# Altium PCB ESP32 with USBC PCB V1l1.PcbDoc (part 1 of 3)
Units mil, origin at the board's own origin, x right, y up, seen from the top; angles counter-clockwise.
Board outline 2700 x 1000 mil, 4 copper layers (L1, L2, L3, L4), stack 61.581 mil thick; 64 components, 73 nets, 299 pads, 161 vias.
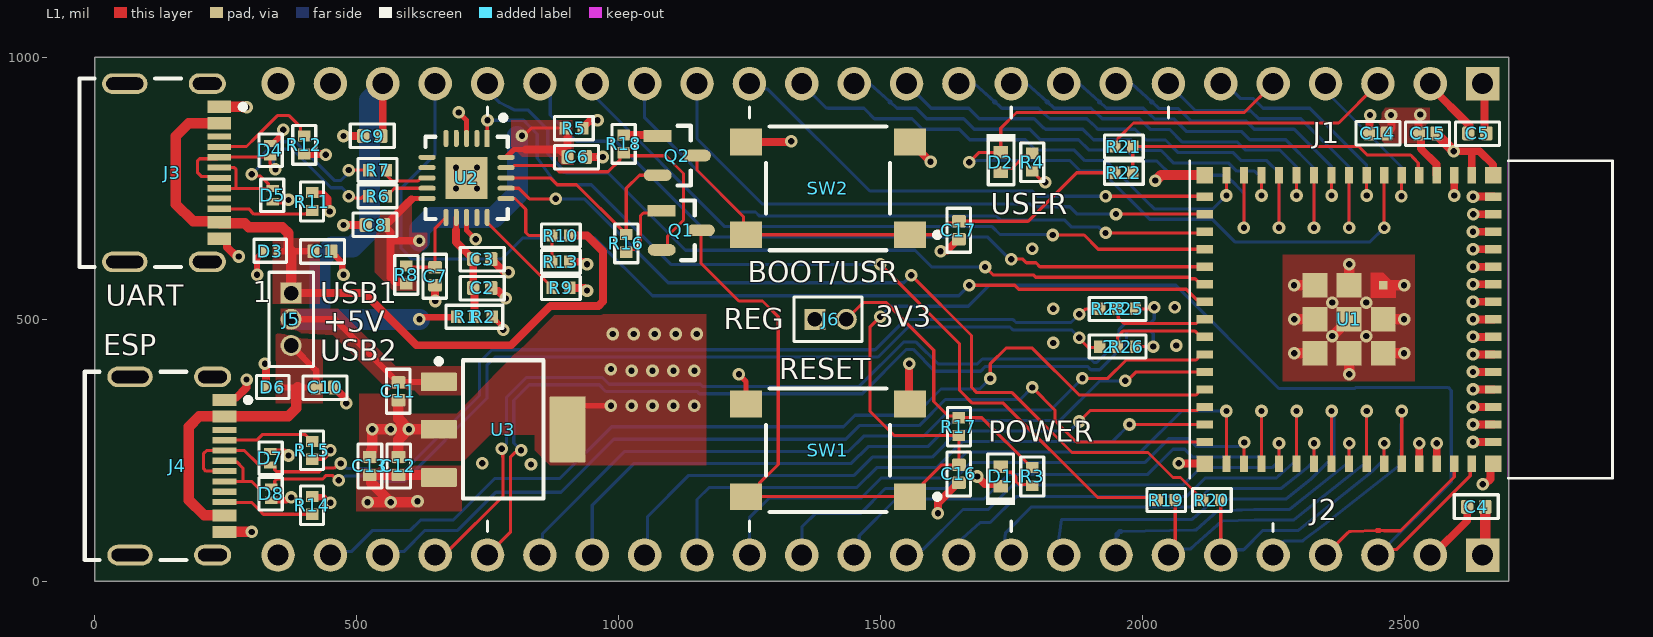
[diagram p0: L1 view]
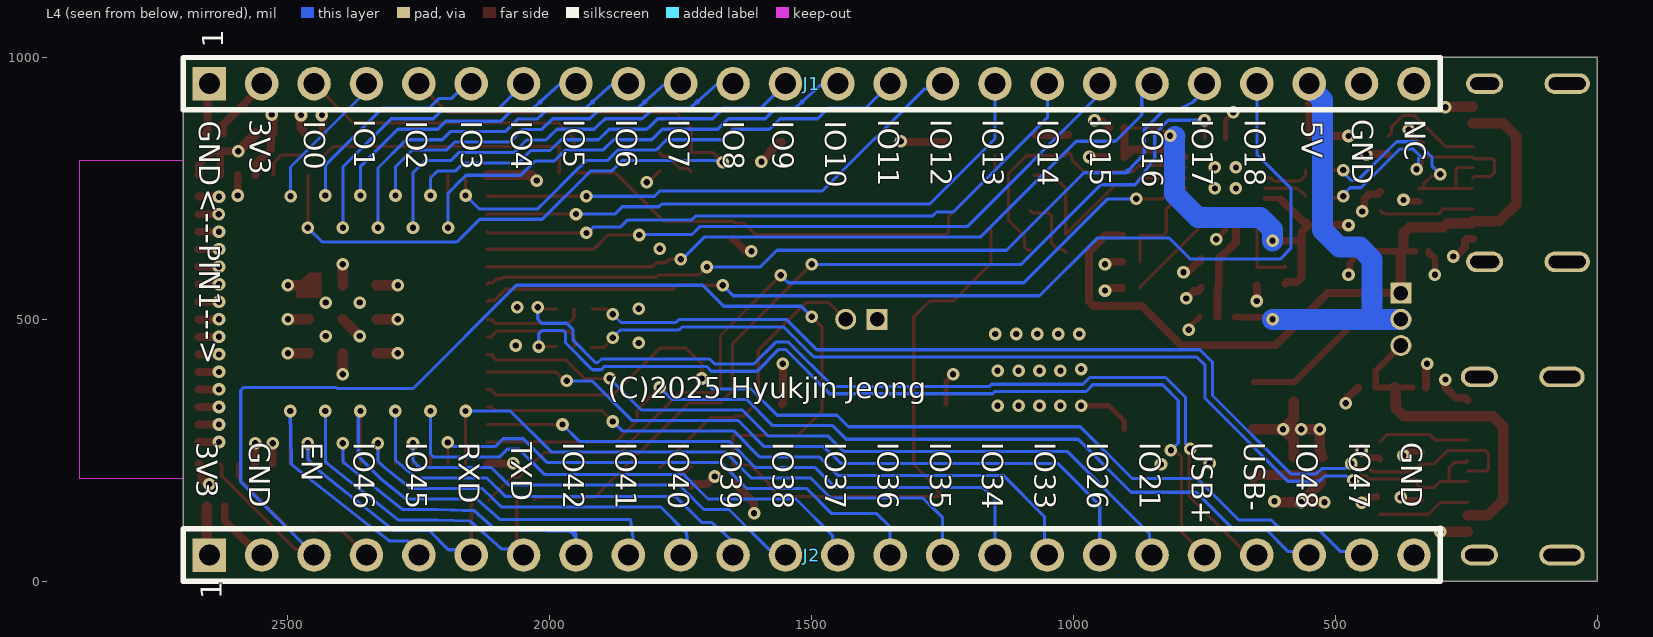
[diagram p1: L4 view, seen from below]
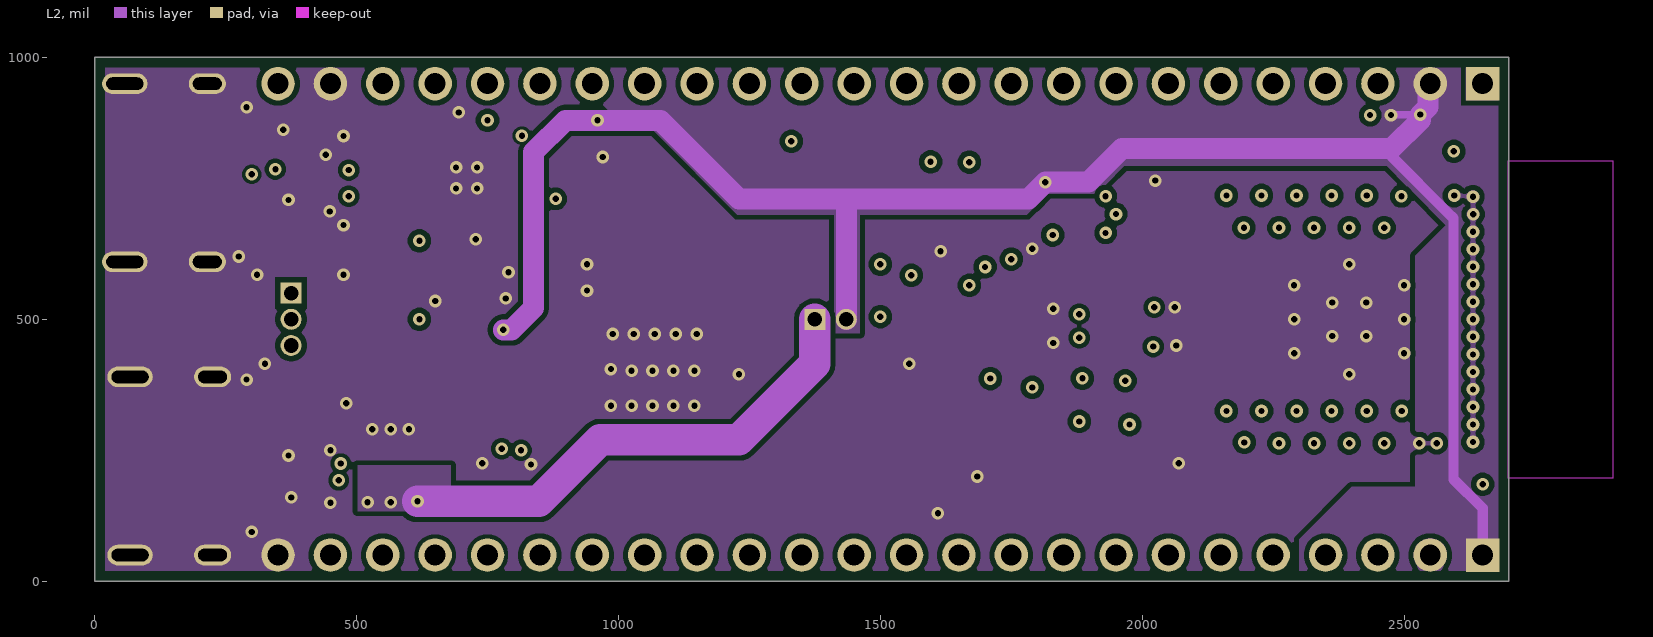
[diagram p2: L2]
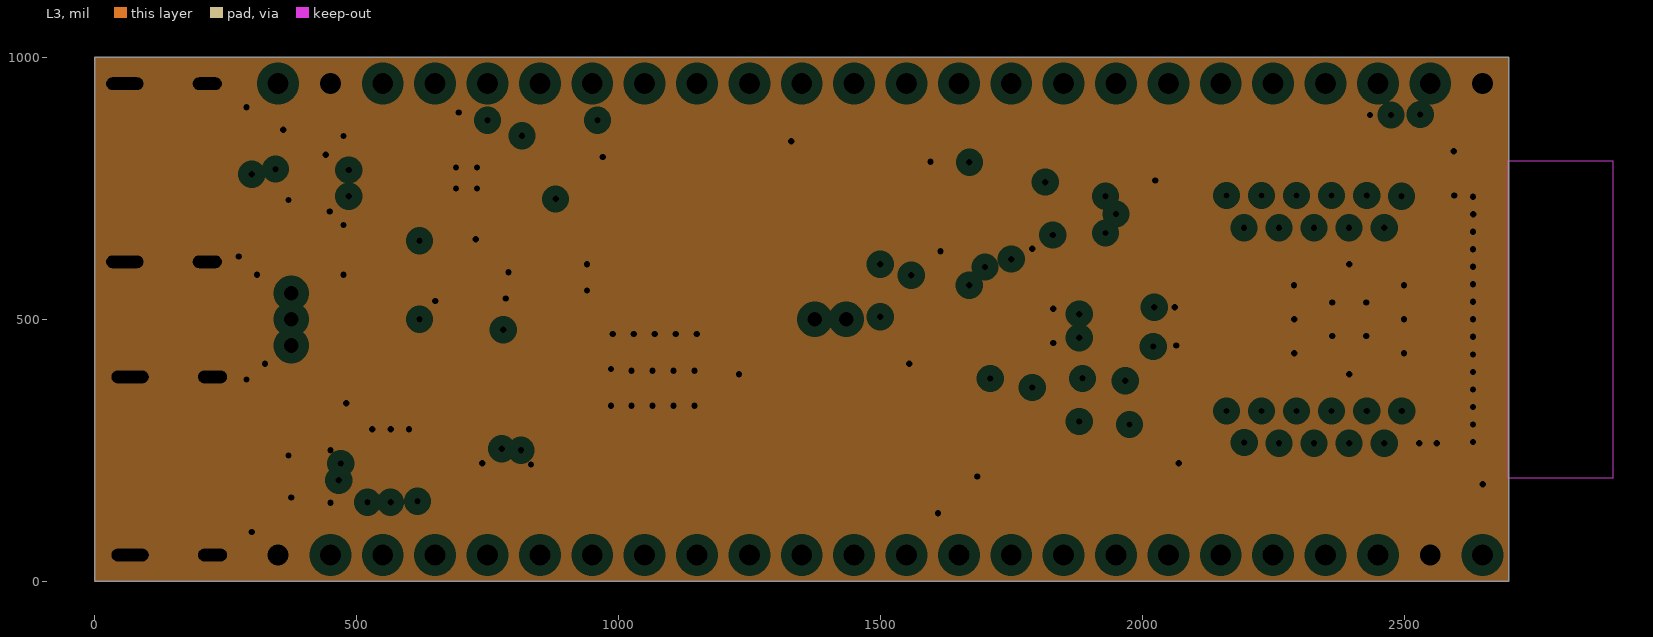
[diagram p3: L3, clearances drawn from the general rule]
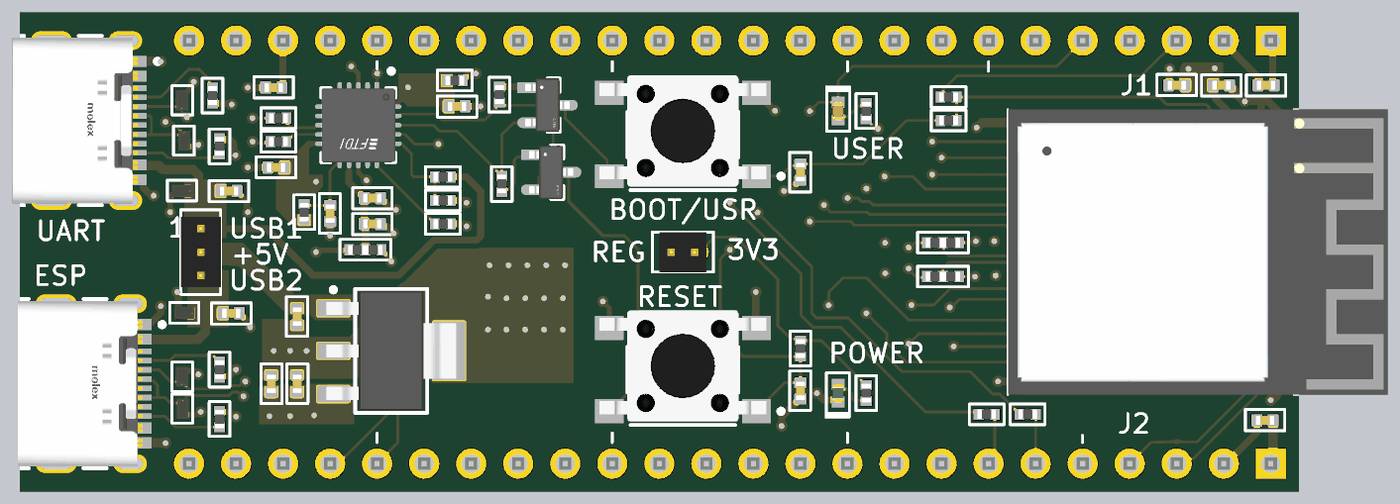
[diagram p5: 3D render of the assembled board from above, using the file's embedded part models]

## Layer stack, top to bottom
Top Solder: solder mask 0.4, Solder Resist, Dk 3.5
L1: signal copper 1.378
Dielectric 2: prepreg 3.913, PP-006, Dk 4.1
L2: signal copper 0.598
Dielectric 1: dielectric 49.803, FR-4, Dk 4.8
L3: plane copper 0.598, net GND
Dielectric 3: prepreg 3.913, PP-006, Dk 4.1
L4: signal copper 1.378
Bottom Solder: solder mask 0.4, Solder Resist, Dk 3.5

## Board outline
0,0 2700,0 2700,1000 0,1000

## Design rules (kind name [scope] priority, off if disabled: settings)
Clearance SMALLER [All vs WithinRoom('FTDI')or WithinRoom('USBC2')or WithinRoom('USBC1')] p1: gap=6 ignorepadtopadclearanceinfootprint=FALSE
Clearance "DIFF90 Clearnace" [InDifferentialPairClass('DIFF90')] p2: gap=8 ignorepadtopadclearanceinfootprint=FALSE
Clearance [All] p3: gap=10 ignorepadtopadclearanceinfootprint=FALSE except(6: SMDPad-SMDPad)
ComponentClearance R1R2 [InComponent('R1-or') vs InComponent('R2-OR')] p1: gap=0 collisioncheckmode=3 verticalgap=0 showdistances=FALSE
ComponentClearance R23R25 [InComponent('R23') vs InComponent('R25')] p2: gap=0 collisioncheckmode=3 verticalgap=0 showdistances=FALSE
ComponentClearance R24R26 [InComponent('R24') vs InComponent('R26')] p3: gap=0 collisioncheckmode=3 verticalgap=0 showdistances=FALSE
ComponentClearance [All] p4: gap=10 collisioncheckmode=3 verticalgap=10 showdistances=FALSE
DiffPairsRouting DIFF90 [InDifferentialPairClass('DIFF90')] p1: maxlimit=8.1 minlimit=8 mostfreqgap=8 toplayer_minwidth=6.03 toplayer_maxwidth=6.23 toplayer_prefwidth=6.03 midlayer1_minwidth=5.1 midlayer1_maxwidth=5.2 midlayer1_prefwidth=5.1 bottomlayer_minwidth=6.03 bottomlayer_maxwidth=6.23 bottomlayer_prefwidth=6.03 maxuncoupledlength=500
MinimumSolderMaskSliver [All] p1: minsoldermaskwidth=3.15
PlaneClearance [All] p1: clearance=20
PlaneConnect [All] p1: pad.planeconnectstyle=Relief pad.reliefexpansion=20 pad.reliefentries=4 pad.reliefconductorwidth=20 pad.reliefairgap=10 via.planeconnectstyle=Direct via.reliefexpansion=20 via.reliefentries=4 via.reliefconductorwidth=10 via.reliefairgap=10
PolygonConnect [All] p1: connectstyle=Direct reliefconductorwidth=10 reliefentries=4 polygonreliefangle="90 Angle" airgapwidth=10
RoomDefinition FTDI [False vs False] p1: confinementstyle=ConfineIn formatcopy=TRUE lockcomponents=FALSE outline 605,870 835,870 835,650 605,650
RoomDefinition USBC1 [False vs False] p2: confinementstyle=ConfineIn formatcopy=TRUE lockcomponents=FALSE outline 165,930 305,930 305,635 165,635
RoomDefinition USBC2 [False vs False] p3: confinementstyle=ConfineIn formatcopy=TRUE lockcomponents=FALSE outline 180,370 315,370 315,75 180,75
RoutingVias [All] p1: holewidth=12 width=24 viastyle="Through Hole" minholewidth=12 minwidth=24 maxholewidth=12 maxwidth=24
SilkToSilkClearance [All] p1: silktosilkclearance=6
SilkToSolderMaskClearance [IsPad] p1: minsilkscreentomaskgap=5 clearancetoexposedcopper=TRUE
SolderMaskExpansion [All] p1: expansion=2 istentingtop=FALSE
SupplyNets "Schematic Supply Nets_5" [InNet('GND')] p1: voltage=0.000
SupplyNets "Schematic Supply Nets_3" [InNet('+3V3')] p2: voltage=0.000
SupplyNets "Schematic Supply Nets_4" [InNet('+5V_VBUS1')] p3: voltage=0.000
SupplyNets "Schematic Supply Nets_2" [InNet('+5V_VBUS2')] p4: voltage=0.000
SupplyNets "Schematic Supply Nets_1" [InNet('+3V3_REG')] p5: voltage=0.000
SupplyNets "Schematic Supply Nets" [InNet('+5V')] p6: voltage=0.000
Width [All] p1: maxlimit=100 minlimit=6 preferedwidth=10 minimp=50.000000 maximp=50.000000 favimp=50.000000
23 further rules are at their usual default settings.

## Classes and differential pairs
differential pair class DIFF90: CON1_USB CON2_USB CON_ESP_USB ESP_USB FTDI_USB
differential pair FTDI_USB: +FTDI_USB_P -FTDI_USB_N
differential pair ESP_USB: +ESP_USB_P -ESP_USB_N
differential pair CON_ESP_USB: +CON_ESP_USB_P -CON_ESP_USB_N
differential pair CON2_USB: +CON2_USB_P -CON2_USB_N
differential pair CON1_USB: +CON1_USB_P -CON1_USB_N

## Components (designator, comment, footprint, x,y, rotation, side; value= is the part's Value field where it differs from the comment)
2 "0R" RESC1005X37N#1 1936,448 r0 top value=0Ω (schematic designator R24)
C1 "100nF, 50V" CAPC1005X65N 435,630 r180 top value=100nF
C2 "4u7, 16V" CAPC1005X65N 740,560 r180 top value=4.7µF
C3 "100nF, 50V" CAPC1005X65N 740,615 r180 top value=100nF
C4 "100nF, 50V" CAPC1005X65N 2637.8,142 r0 top value=100nF
C5 "100nF, 50V" CAPC1005X65N 2640,855 r180 top value=100nF
C6 "100nF, 50V" CAPC1005X65N 920,810 r180 top value=100nF
C7 "100nF, 50V" CAPC1005X65N 650,582.2 r90 top value=100nF
C8 "100nF, 50V" CAPC1005X65N 535,680 r0 top value=100nF
C9 "100nF, 50V" CAPC1005X65N 530,850 r0 top value=100nF
C10 "100nF, 50V" CAPC1005X65N 440,370 r180 top value=100nF
C11 "4u7, 16V" CAPC1005X65N 580,362.8 r90 top value=4.7µF
C12 "10uF, 10V" CAPC1005X65N 580,220 r270 top value=10µF
C13 "10uF, 10V" CAPC1005X65N 525,220 r270 top value=10µF
C14 "10uF, 10V" CAPC1005X65N 2450,855 r0 top value=10µF
C15 "100nF, 50V" CAPC1005X65N 2545,855 r180 top value=100nF
C16 "1uF, 35V" CAPC1005X65N 1650,205 r90 top value=1µF
C17 "100nF, 50V" CAPC1005X65N 1650,670 r90 top value=100nF
D1 "GREEN" LED0402G 1730,200 r90 top
D2 "RED" LED0402R 1730,800 r270 top
D3 "AQ3045-01ETG" SOD882 335,630 r0 top
D4 "AQ3045-01ETG" SOD882 335,822.8 r270 top
D5 "AQ3045-01ETG" SOD882 340,737.2 r90 top
D6 "AQ3045-01ETG" SOD882 340,370 r0 top
D7 "AQ3045-01ETG" SOD882 335,234.8 r270 top
D8 "AQ3045-01ETG" SOD882 337,167.2 r90 top
J1 "22-28-4245" HDR_1X24_2.54MM 2650,950 r90 bottom
J2 "22-28-4245" HDR_1X24_2.54MM 2650,50 r90 bottom locked
J3 "217179-0001" FP-2171790001-MFG 102.8,779.92 r270 top
J4 "217179-0001" FP-2171790001-MFG 112.8,220.08 r270 top
J5 "FTS-103-01-F-S" HDR_1X3_1.27MM 375,550 r0 top locked
J6 "FTS-102-01-F-S" HDR_1X2_1.27MM 1375,500 r90 top
Q1 "SS8050-G" FP-SS8050-G-IPC_B 1120,670 r0 top
Q2 "SS8050-G" FP-SS8050-G-IPC_B 1112.42,812.6 r0 top
R1 "0R" RESC1005X37N#1 708,505 r0 top value=0Ω
R2 "0R" RESC1005X37N#1 742.01,505 r180 top value=0Ω
R3 "1K" RESC1005X37N#1 1790,200 r90 top value=10kΩ
R4 "1K" RESC1005X37N#1 1790,800 r270 top value=10kΩ
R5 "0R" RESC1005X37N#1 915,865 r180 top value=0Ω
R6 "27R" RESC1005X37N#1 540,735 r0 top value=27Ω
R7 "27R" RESC1005X37N#1 540,785 r0 top value=27Ω
R8 "0R" RESC1005X37N#1 595,585 r90 top value=0Ω
R9 "10k" RESC1005X37N#1 890,560 r0 top value=10kΩ
R10 "4k7" RESC1005X37N#2 890,660 r0 top value=4.7kΩ
R11 "5k1" RESC1005X37N#1 415,725 r270 top value=5.1kΩ
R12 "5k1" RESC1005X37N#1 400,832.99 r90 top value=5.1kΩ
R13 "10k" RESC1005X37N#1 890,610 r180 top value=10kΩ
R14 "5k1" RESC1005X37N#1 415,145 r270 top value=5.1kΩ
R15 "5k1" RESC1005X37N#1 415,250 r90 top value=5.1kΩ
R16 "10k" RESC1005X37N#1 1015,645 r270 top value=10kΩ
R17 "10k" RESC1005X37N#1 1650,295 r90 top value=10kΩ
R18 "10k" RESC1005X37N#1 1010,835 r90 top value=10kΩ
R19 "0R" RESC1005X37N#1 2046,155 r180 top value=0Ω
R20 "0R" RESC1005X37N#1 2133,155 r180 top value=0Ω
R21 "27R" RESC1005X37N#1 1965,830 r0 top value=27Ω
R22 "27R" RESC1005X37N#1 1965,780 r0 top value=27Ω
R23 "0R" RESC1005X37N#1 1936,520 r0 top value=0Ω
R25 "0R" RESC1005X37N#1 1970,520 r180 top value=0Ω
R26 "0R" RESC1005X37N#1 1970,448 r180 top value=0Ω
SW1 "PTS645SH50SMTR92LFS" FP-PTS645SH50SMTR92LFS-MFG 1400,250 r180 top locked
SW2 "PTS645SH50SMTR92LFS" FP-PTS645SH50SMTR92LFS-MFG 1400,750 r180 top locked
U1 "ESP32-S3-MINI-1-N8" XCVR_ESP32-S3-MINI-1-N8 2395.04,500 r270 top
U2 "FT231XQ-R" FP-QFN-20-IPC_B 710,770 r270 top
U3 "TL1963A-33DCYR" DCY0004A_N 780,290 r0 top locked

## Footprints (in the part's own frame and the unit in brackets; to place one, negate y for a bottom-side part, rotate by r counter-clockwise, add the part's x,y. Pads: shape width x height; smd on the part's side, far side on the other; paste and mask are expansions set on the pad)
CAPC1005X65N [mm]
  rrect25% 0.6x0.67 smd: 1(-0.437,0) 2(0.437,0)
  silkscreen extent -1.07,-0.56 1.07,0.58, body extent -0.5,-0.25 0.5,0.25, height 0.65
DCY0004A_N [mm] "SOT223, 4-Leads, Body 6.7x3.7mm, Pitch 2.3mm, IPC Medium Density"
  rrect11% 1.75x0.9 smd: 1(-3.125,2.3) 2(-3.125,0) 3(-3.125,-2.337)
  rrect6% 1.75x3.2 smd: 4(3.125,0)
  silkscreen extent -3.25,-3.35 1.95,3.42, body extent -3.5,-3.25 3.5,3.25, height 1.62
FP-2171790001-MFG [mm]
  rect 0.6x1.15 smd paste+0 mask+0: A1B12(-3.2,3.425) A4B9(-2.4,3.425) B1A12(3.2,3.425) B4A9(2.4,3.425)
  rect 0.3x1.15 smd paste+0 mask+0: A5(-1.25,3.425) A6(-0.25,3.425) A7(0.25,3.425) A8(1.25,3.425) B5(1.75,3.425) B6(0.75,3.425) B7(-0.75,3.425) B8(-1.75,3.425)
  rrect100% 1x1.8 hole 1.4 slot 0.6 at 0 deg paste-2539.97 mask+0: S1(-4.32,2.85) S2(4.32,2.85)
  rrect100% 1x2.2 hole 1.8 slot 0.6 at 0 deg paste-2539.97 mask+0: S3(-4.32,-1.15) S4(4.32,-1.15)
  silkscreen extent -4.57,-3.35 4.57,4.7, body extent -4.92,-3.45 4.92,4.1, height 0.25
FP-PTS645SH50SMTR92LFS-MFG [mm]
  rect 1.55x1.3 smd paste+0 mask+0: 1(-3.975,2.25) 2(3.975,2.25) 3(-3.975,-2.25) 4(3.975,-2.25)
  silkscreen extent -5.43,-3 3,3, body extent -4.5,-3.2 4.5,2.8, height 5
FP-QFN-20-IPC_B [mm]
  rect 0.84x0.242 smd paste+0 mask+0: 1(-1.916,1)
  rrect100% 0.84x0.242 smd paste+0 mask+0: 2(-1.916,0.5) 3(-1.916,0) 4(-1.916,-0.5) 5(-1.916,-1) 11(1.916,-1) 12(1.916,-0.5) 13(1.916,0) 14(1.916,0.5) 15(1.916,1)
  rrect100% 0.242x0.84 smd paste+0 mask+0: 6(-1,-1.916) 7(-0.5,-1.916) 8(0,-1.916) 9(0.5,-1.916) 10(1,-1.916) 16(1,1.916) 17(0.5,1.916) 18(0,1.916) 19(-0.5,1.916) 20(-1,1.916)
  rect 2.05x2.05 smd paste-1000 mask+0: 21(0,0)
  silkscreen extent -3.05,-2 2,2, body extent -2.59,-2.59 2.59,2.59, height 0.25
FP-SS8050-G-IPC_B [mm]
  rect 1.357x0.572 smd paste+0 mask+0: 1(-0.951,0.95)
  rrect100% 1.357x0.572 smd paste+0 mask+0: 2(-0.951,-0.95) 3(0.951,0)
  silkscreen extent 0,-1.45 0.65,1.45, body extent -1.88,-1.7 1.88,1.7, height 0.25
HDR_1X2_1.27MM [mil]
  rect 40x40 hole 28: 1(0,0)
  round 40 hole 28: 2(0,-60)
  silkscreen extent -42,-90 43,40, body extent -42,-75 43,25, height 154
HDR_1X3_1.27MM [mil]
  rect 40x40 hole 28: 1(0,0)
  round 40 hole 28: 2(0,-50) 3(0,-100)
  silkscreen extent -42,-140 42,40, body extent -42,-125 42,25, height 154
HDR_1X24_2.54MM [mil]
  rect 64x64 hole 40: 1(0,0)
  round 64 hole 40: 2(0,-100) 3(0,-200) 4(0,-300) 5(0,-400) 6(0,-500) 7(0,-600) 8(0,-700) 9(0,-800) 10(0,-900) 11(0,-1000) 12(0,-1100) 13(0,-1200) 14(0,-1300) 15(0,-1400) 16(0,-1500) 17(0,-1600) 18(0,-1700) 19(0,-1800) 20(0,-1900) 21(0,-2000) 22(0,-2100) 23(0,-2200) 24(0,-2300)
  silkscreen extent -50,-2350 50,50, body extent -49,-2350 49,50, height 340
LED0402G [mm]
  rect 0.6x0.7 smd: 1(-0.475,0) 2(0.475,0)
  silkscreen extent -1.37,-0.69 1.09,0.71, body extent -0.5,-0.3 0.5,0.3, height 0.2
LED0402R [mm]
  rect 0.6x0.7 smd: 1(-0.475,0) 2(0.475,0)
  silkscreen extent -1.37,-0.69 1.09,0.71, body extent -0.5,-0.3 0.5,0.3, height 0.2
RESC1005X37N#1 [mm]
  rect 0.54x0.6 smd: 1(-0.432,0) 2(0.432,0)
  silkscreen extent -0.94,-0.56 0.94,0.56, body extent -0.5,-0.25 0.5,0.25, height 0.37
RESC1005X37N#2 [mm]
  rect 0.54x0.6 smd: 2(0.432,0) ""(-0.432,0)
  silkscreen extent -0.94,-0.56 0.94,0.56, body extent -0.5,-0.25 0.5,0.25, height 0.37
SOD882 [mm]
  rect 0.35x0.6 smd: 1(-0.325,0) 2(0.325,0)
  silkscreen extent -0.79,-0.53 0.79,0.58, body extent -0.55,-0.33 0.55,0.33, height 0.57
XCVR_ESP32-S3-MINI-1-N8 [mm]
  rect 0.8x0.4 smd: 1(-7,5.95) 2(-7,5.1) 3(-7,4.25) 4(-7,3.4) 5(-7,2.55) 6(-7,1.7) 7(-7,0.85) 8(-7,0) 9(-7,-0.85) 10(-7,-1.7) 11(-7,-2.55) 12(-7,-3.4) 13(-7,-4.25) 14(-7,-5.1) 15(-7,-5.95) 31(7,-5.95) 32(7,-5.1) 33(7,-4.25) 34(7,-3.4) 35(7,-2.55) 36(7,-1.7) 37(7,-0.85) 38(7,0) 39(7,0.85) 40(7,1.7) 41(7,2.55) 42(7,3.4) 43(7,4.25) 44(7,5.1) 45(7,5.95)
  rect 0.4x0.8 smd: 16(-5.95,-7) 17(-5.1,-7) 18(-4.25,-7) 19(-3.4,-7) 20(-2.55,-7) 21(-1.7,-7) 22(-0.85,-7) 23(0,-7) 24(0.85,-7) 25(1.7,-7) 26(2.55,-7) 27(3.4,-7) 28(4.25,-7) 29(5.1,-7) 30(5.95,-7) 46(5.95,7) 47(5.1,7) 48(4.25,7) 49(3.4,7) 50(2.55,7) 51(1.7,7) 52(0.85,7) 53(0,7) 54(-0.85,7) 55(-1.7,7) 56(-2.55,7) 57(-3.4,7) 58(-4.25,7) 59(-5.1,7) 60(-5.95,7)
  rect 1.2x1.2 smd: 61(0,0) 67(0,1.65) 68(1.65,1.65) 69(-1.65,0) 70(1.65,0) 71(-1.65,-1.65) 72(0,-1.65) 73(1.65,-1.65)
  rect 0.8x0.8 smd: 62(-7,7) 63(-7,-7) 64(7,-7) 65(7,7)
  rect 0.4x0.4 smd paste-1 mask+0: 66(-1.65,1.65)
  L1 region: -1.05,1.05 -2.25,1.05 -2.25,1.65 -1.65,2.25 -1.05,2.25
  Keep-Out Layer region: 7.7,7.725 -7.7,7.725 -7.7,12.775 7.7,12.775
  Keep-Out Layer region: 7.7,7.725 -7.7,7.725 -7.7,12.775 7.7,12.775
  silkscreen extent -7.7,-7.73 7.7,12.78, body extent -7.7,-7.71 7.7,12.79, height 2.56

## Part data
2 R1 R2 R5 R8 R19 R20 R23 R25 R26: library part RC0402JR-070RL, "RES 0 OHM JUMPER 1/16W 0402", Case Code (Imperial)=0402, LCSC Part Number=C60485, Manufacturer="Yageo Group", Max Operating Temperature=155°C, Max Power Dissipation=63mW, Min Operating Temperature=-55°C, Power Dissipation=62.5mW, Supplier Part Number=311-0.0JRCT-ND, Temperature Coefficient=200ppm/°C, Tolerance=5%, Voltage Rating=50V, Case/Package=0402, Category="Chip SMD Resistors", China RoHS=Non-Compliant, ComponentLink1Description=https://datasheet.octopart.com:443/RC0402JR-070RL-Yageo-datasheet-182189538.pdf?src-supplier=IHS, ComponentLink1URL=https://datasheet.octopart.com:443/RC0402JR-070RL-Yageo-datasheet-182189538.pdf?src-supplier=IHS, ComponentLink2Description=https://datasheet.octopart.com:443/RC0402JR-070RL-Yageo-datasheet-10408619.pdf?src-supplier=Newark, ComponentLink2URL=https://datasheet.octopart.com:443/RC0402JR-070RL-Yageo-datasheet-10408619.pdf?src-supplier=Newark, ComponentLink3Description=https://datasheet.octopart.com:443/RC0402JR-070RL-Yageo-datasheet-12531192.pdf?src-supplier=Seeed+Studio, ComponentLink3URL=https://datasheet.octopart.com:443/RC0402JR-070RL-Yageo-datasheet-12531192.pdf?src-supplier=Seeed+Studio, ComponentLink4Description=https://datasheet.octopart.com:443/RC0402JR-070RL-Yageo-datasheet-8324527.pdf?src-supplier=TME, ComponentLink4URL=https://datasheet.octopart.com:443/RC0402JR-070RL-Yageo-datasheet-8324527.pdf?src-supplier=TME, ComponentLink5Description=https://datasheet.octopart.com:443/RC0402JR-070RL-Yageo-datasheet-62067350.pdf?src-supplier=Farnell, ComponentLink5URL=https://datasheet.octopart.com:443/RC0402JR-070RL-Yageo-datasheet-62067350.pdf?src-supplier=Farnell, ComponentLink6Description=https://datasheet.octopart.com:443/RC0402JR-070RL-Yageo-datasheet-8329306.pdf?src-supplier=element14, ComponentLink6URL=https://datasheet.octopart.com:443/RC0402JR-070RL-Yageo-datasheet-8329306.pdf?src-supplier=element14, ComponentLink7Description=https://datasheet.octopart.com:443/RC0402JR-070RL-Yageo-datasheet-505231.pdf?src-supplier=element14, ComponentLink7URL=https://datasheet.octopart.com:443/RC0402JR-070RL-Yageo-datasheet-505231.pdf?src-supplier=element14, ComponentLink8Description=https://datasheet.octopart.com:443/RC0402JR-070RL-Yageo-datasheet-175423674.pdf?src-supplier=SOS+electronic, ComponentLink8URL=https://datasheet.octopart.com:443/RC0402JR-070RL-Yageo-datasheet-175423674.pdf?src-supplier=SOS+electronic, ComponentLink9Description=https://datasheet.octopart.com:443/RC0402JR-070RL-Yageo-datasheet-164759695.pdf?src-supplier=Future+Electronics, ComponentLink9URL=https://datasheet.octopart.com:443/RC0402JR-070RL-Yageo-datasheet-164759695.pdf?src-supplier=Future+Electronics, ComponentLink10Description=https://datasheet.octopart.com:443/RC0402JR-070RL-Yageo-datasheet-137700087.pdf?src-supplier=Future+Electronics, ComponentLink10URL=https://datasheet.octopart.com:443/RC0402JR-070RL-Yageo-datasheet-137700087.pdf?src-supplier=Future+Electronics, ComponentLink11Description=https://datasheet.octopart.com/RC0402JR-070RL-Yageo-datasheet-73766026.pdf, ComponentLink11URL=https://datasheet.octopart.com/RC0402JR-070RL-Yageo-datasheet-73766026.pdf, ComponentLink12Description=http://sigma.octopart.com:80/rohs_statement/Yageo-company-2.pdf?src-supplier=Compliance+Statements, ComponentLink12URL=http://sigma.octopart.com:80/rohs_statement/Yageo-company-2.pdf?src-supplier=Compliance+Statements, ComponentLink13Description=http://sigma.octopart.com:80/conflict_mineral_statement/Yageo-company-3.pdf?src-supplier=Compliance+Statements, ComponentLink13URL=http://sigma.octopart.com:80/conflict_mineral_statement/Yageo-company-3.pdf?src-supplier=Compliance+Statements, Composition="Thick Film", Contact Plating=Tin, Depth=500µm, Features="Moisture Resistant", Height=350µm, Lead Free="Lead Free", Length=1mm, Lifecycle Status=Production, Manufacturer Part Number=RC0402JR-070RL, Military Standard=Not, Mounting Technology="Surface Mount", Number of Terminals=2, Number of Terminations=2, Packaging="Tape & Reel", Pins=2, Power Rating=63mW, Pricing="1=0.1, 10=0.010, 25=0.0064, 50=0.0054, 100=0.0047, 250=0.00392, 500=0.00346, 1000=0.00304, 5000=0.0023, 10000=0.00206, 20000=0.00185, 30000=0.00175, 50000=0.00163, 70000=0.00155, 100000=0.00148, 120000=0.00145, 240000=0.00134, 250000=0.00133 (USD)", Radiation Hardening=No, REACH SVHC=Yes, RoHS=Compliant, Schedule B="8533290000, 8533290000|8533290000, 8533290000|8533290000|8533290000, 8533290000|8533290000|8533290000|8533290000", Stock=21680023, Supplier=DigiKey, Termination=SMD/SMT, Voltage Rating (DC)=50V, Width=500µm
C1 C3 C4 C5 C6 C7 C8 C9 C10 C15 C17: library part CL05B104KB54PNC, "CAP CER 0.1UF 50V X7R 0402", Case/Package=0402, Dielectric Material=Ceramic, LCSC Part Number=C307331, Manufacturer="Samsung Electro-Mechanics", Max Operating Temperature=125°C, Min Operating Temperature=-55°C, Supplier Part Number=1276-CL05B104KB54PNCCT-ND, Tolerance=10%, Voltage Rating=50V, Category="Ceramic Capacitors", China RoHS=Compliant, ComponentLink1Description=https://datasheet.octopart.com:443/CL05B104KB54PNC-Samsung-Electro-Mechanics-datasheet-182018727.pdf?src-supplier=IHS, ComponentLink1URL=https://datasheet.octopart.com:443/CL05B104KB54PNC-Samsung-Electro-Mechanics-datasheet-182018727.pdf?src-supplier=IHS, ComponentLink2Description=https://datasheet.octopart.com:443/CL05B104KB54PNC-Samsung-Electro-Mechanics-datasheet-138685816.pdf?src-supplier=Samsung+SCT, ComponentLink2URL=https://datasheet.octopart.com:443/CL05B104KB54PNC-Samsung-Electro-Mechanics-datasheet-138685816.pdf?src-supplier=Samsung+SCT, ComponentLink3Description=https://datasheet.octopart.com:443/CL05B104KB54PNC-Samsung-datasheet-8326407.pdf?src-supplier=TME, ComponentLink3URL=https://datasheet.octopart.com:443/CL05B104KB54PNC-Samsung-datasheet-8326407.pdf?src-supplier=TME, Height=500µm, Length=1mm, Lifecycle Status=Production, Manufacturer Part Number=CL05B104KB54PNC, Material=Ceramic, Mounting Technology="Surface Mount", Number of Terminals=2, Pricing="1=0.1, 10=0.036, 50=0.0246, 100=0.021, 500=0.01504, 1000=0.01387, 2500=0.01181, 5000=0.01103, 10000=0.00927 (USD)", REACH SVHC=Yes, RoHS=Yes, Schedule B="8532240020, 8532240020|8532240020|8532240020|8532240020|8532240020|8532240020|8532240020|8532240020|8532240020|8532240020|8532240020|8532240020|8532240020|8532240020|8532240020|8532240020|8532240020|8532240020|8532240020|8532240020|8532240020|8532240020|8532240020|85", Supplier=DigiKey, Voltage Rating (DC)=50V, Width=500µm
C2 C11: library part CL05A475MO5NUNC, "CAP CER 4.7UF 16V X5R 0402", Case Code (Imperial)=0402, Case Code (Metric)=1005, Dielectric=X5R, Dielectric Material=Ceramic, LCSC Part Number=C318563, Manufacturer="Samsung Electro-Mechanics", Max Operating Temperature=85°C, Min Operating Temperature=-55°C, Supplier Part Number=1276-6836-1-ND, Tolerance=20%, Voltage Rating=16V, Case/Package=0402, Category="Ceramic Capacitors", China RoHS=Compliant, ComponentLink1Description=https://datasheet.octopart.com:443/CL05A475MO5NUNC-Samsung-Electro-Mechanics-datasheet-178175196.pdf?src-supplier=Farnell, ComponentLink1URL=https://datasheet.octopart.com:443/CL05A475MO5NUNC-Samsung-Electro-Mechanics-datasheet-178175196.pdf?src-supplier=Farnell, ComponentLink2Description=https://datasheet.octopart.com:443/CL05A475MO5NUNC-Samsung-Electro-Mechanics-datasheet-123102911.pdf?src-supplier=Future+Electronics, ComponentLink2URL=https://datasheet.octopart.com:443/CL05A475MO5NUNC-Samsung-Electro-Mechanics-datasheet-123102911.pdf?src-supplier=Future+Electronics, ComponentLink3Description=https://datasheet.octopart.com:443/CL05A475MO5NUNC-Samsung-Electro-Mechanics-datasheet-110226225.pdf?src-supplier=Future+Electronics, ComponentLink3URL=https://datasheet.octopart.com:443/CL05A475MO5NUNC-Samsung-Electro-Mechanics-datasheet-110226225.pdf?src-supplier=Future+Electronics, ComponentLink4Description=https://datasheet.octopart.com:443/CL05A475MO5NUNC-Samsung-Electro-Mechanics-datasheet-83567908.pdf?src-supplier=Future+Electronics, ComponentLink4URL=https://datasheet.octopart.com:443/CL05A475MO5NUNC-Samsung-Electro-Mechanics-datasheet-83567908.pdf?src-supplier=Future+Electronics, ComponentLink5Description=https://datasheet.octopart.com:443/CL05A475MO5NUNC-Samsung-Electro-Mechanics-datasheet-68297032.pdf?src-supplier=Future+Electronics, ComponentLink5URL=https://datasheet.octopart.com:443/CL05A475MO5NUNC-Samsung-Electro-Mechanics-datasheet-68297032.pdf?src-supplier=Future+Electronics, ComponentLink6Description=https://datasheet.octopart.com:443/CL05A475MO5NUNC-Samsung-Electro-Mechanics-datasheet-87580057.pdf?src-supplier=Future+Electronics, ComponentLink6URL=https://datasheet.octopart.com:443/CL05A475MO5NUNC-Samsung-Electro-Mechanics-datasheet-87580057.pdf?src-supplier=Future+Electronics, ComponentLink7Description=https://datasheet.octopart.com:443/CL05A475MO5NUNC-Samsung-Electro-Mechanics-datasheet-149136694.pdf?src-supplier=Future+Electronics, ComponentLink7URL=https://datasheet.octopart.com:443/CL05A475MO5NUNC-Samsung-Electro-Mechanics-datasheet-149136694.pdf?src-supplier=Future+Electronics, Height=500µm, Length=1mm, Lifecycle Status=Production, Manufacturer Part Number=CL05A475MO5NUNC, Material=Ceramic, Mounting Technology="Surface Mount", Number of Terminals=2, Pricing="1=0.12, 10=0.084, 10000=0.06881 (USD)", REACH SVHC=Yes, RoHS=Compliant, Schedule B="8532240020, 8532240020|8532240020, 8532240020|8532240020|8532240020, 8532240020|8532240020|8532240020|8532240020", Stock=112494, Supplier=DigiKey, Thickness=558.8µm, Voltage Rating (DC)=16V, Width=500µm
C12 C13 C14: library part CL05A106MP8NUB8, "CAP CER 10UF 10V X5R 0402", Case Code (Imperial)=0402, Case Code (Metric)=1005, Dielectric Material=Ceramic, LCSC Part Number=C307415, Manufacturer="Samsung Electro-Mechanics", Max Operating Temperature=85°C, Min Operating Temperature=-55°C, Supplier Part Number=1276-6830-6-ND, Tolerance=20%, Voltage Rating=10V, Case/Package=0402, Category="Ceramic Capacitors", China RoHS=Compliant, ComponentLink1Description=https://datasheet.octopart.com:443/CL05A106MP8NUB8-Samsung-Electro-Mechanics-datasheet-136460857.pdf?src-supplier=IHS, ComponentLink1URL=https://datasheet.octopart.com:443/CL05A106MP8NUB8-Samsung-Electro-Mechanics-datasheet-136460857.pdf?src-supplier=IHS, ComponentLink2Description=https://datasheet.octopart.com:443/CL05A106MP8NUB8-Samsung-Electro-Mechanics-datasheet-181551178.pdf?src-supplier=Newark, ComponentLink2URL=https://datasheet.octopart.com:443/CL05A106MP8NUB8-Samsung-Electro-Mechanics-datasheet-181551178.pdf?src-supplier=Newark, ComponentLink3Description=https://datasheet.octopart.com:443/CL05A106MP8NUB8-Samsung-Electro-Mechanics-datasheet-136031724.pdf?src-supplier=Newark, ComponentLink3URL=https://datasheet.octopart.com:443/CL05A106MP8NUB8-Samsung-Electro-Mechanics-datasheet-136031724.pdf?src-supplier=Newark, ComponentLink4Description=https://datasheet.octopart.com:443/CL05A106MP8NUB8-Samsung-Electro-Mechanics-datasheet-141346815.pdf?src-supplier=Samsung+SCT, ComponentLink4URL=https://datasheet.octopart.com:443/CL05A106MP8NUB8-Samsung-Electro-Mechanics-datasheet-141346815.pdf?src-supplier=Samsung+SCT, ComponentLink5Description=https://datasheet.octopart.com:443/CL05A106MP8NUB8-Samsung-Electro-Mechanics-datasheet-110326781.pdf?src-supplier=Future+Electronics, ComponentLink5URL=https://datasheet.octopart.com:443/CL05A106MP8NUB8-Samsung-Electro-Mechanics-datasheet-110326781.pdf?src-supplier=Future+Electronics, ComponentLink6Description=https://datasheet.octopart.com:443/CL05A106MP8NUB8-Samsung-Electro-Mechanics-datasheet-96443587.pdf?src-supplier=Future+Electronics, ComponentLink6URL=https://datasheet.octopart.com:443/CL05A106MP8NUB8-Samsung-Electro-Mechanics-datasheet-96443587.pdf?src-supplier=Future+Electronics, ComponentLink7Description=https://datasheet.octopart.com:443/CL05A106MP8NUB8-Samsung-Electro-Mechanics-datasheet-68297032.pdf?src-supplier=Future+Electronics, ComponentLink7URL=https://datasheet.octopart.com:443/CL05A106MP8NUB8-Samsung-Electro-Mechanics-datasheet-68297032.pdf?src-supplier=Future+Electronics, ComponentLink8Description=https://datasheet.octopart.com:443/CL05A106MP8NUB8-Samsung-Electro-Mechanics-datasheet-86032222.pdf?src-supplier=Future+Electronics, ComponentLink8URL=https://datasheet.octopart.com:443/CL05A106MP8NUB8-Samsung-Electro-Mechanics-datasheet-86032222.pdf?src-supplier=Future+Electronics, Height=800µm, Length=1mm, Lifecycle Status=Production, Manufacturer Part Number=CL05A106MP8NUB8, Material=Ceramic, Mounting Technology="Surface Mount", Number of Terminals=2, Pricing="1=0.13, 10=0.077, 50=0.0678 (USD)", REACH SVHC=Yes, RoHS=Compliant, Schedule B="8532240020, 8532240020|8532240020, 8532240020|8532240020|8532240020, 8532240020|8532240020|8532240020|8532240020", Supplier=DigiKey, Thickness=889µm, Voltage Rating (DC)=10V, Width=500µm
C16: library part CL05A105KL5NRNC, "CAP CER 1UF 35V X5R 0402", Case Code (Imperial)=0402, Case Code (Metric)=1005, Dielectric Material=Ceramic, LCSC Part Number=C307413, Manufacturer="Samsung Electro-Mechanics", Max Operating Temperature=85°C, Min Operating Temperature=-55°C, Supplier Part Number=1276-6796-6-ND, Tolerance=10%, Voltage Rating=35V, Case/Package=0402, Category="Ceramic Capacitors", China RoHS=Compliant, ComponentLink1Description=https://datasheet.octopart.com:443/CL05A105KL5NRNC-Samsung-Electro-Mechanics-datasheet-182018568.pdf?src-supplier=IHS, ComponentLink1URL=https://datasheet.octopart.com:443/CL05A105KL5NRNC-Samsung-Electro-Mechanics-datasheet-182018568.pdf?src-supplier=IHS, ComponentLink2Description=https://datasheet.octopart.com:443/CL05A105KL5NRNC-Samsung-Electro-Mechanics-datasheet-141346806.pdf?src-supplier=Samsung+SCT, ComponentLink2URL=https://datasheet.octopart.com:443/CL05A105KL5NRNC-Samsung-Electro-Mechanics-datasheet-141346806.pdf?src-supplier=Samsung+SCT, ComponentLink3Description=https://datasheet.octopart.com:443/CL05A105KL5NRNC-Samsung-datasheet-8326407.pdf?src-supplier=TME, ComponentLink3URL=https://datasheet.octopart.com:443/CL05A105KL5NRNC-Samsung-datasheet-8326407.pdf?src-supplier=TME, Height=550µm, Length=990.6µm, Lifecycle Status=Production, Manufacturer Part Number=CL05A105KL5NRNC, Material=Ceramic, Mounting Technology="Surface Mount", Number of Terminals=2, Pricing="1=0.27, 10=0.158, 50=0.1146, 100=0.1012, 500=0.07874, 1000=0.0718, 2500=0.06449, 5000=0.06009 (USD)", REACH SVHC=Yes, RoHS=Compliant, Schedule B="8532240020, 8532240020|8532240020|8532240020|8532240020|8532240020", Supplier=DigiKey, Thickness=558.8µm, Voltage Rating (DC)=35V, Width=508µm
D1: library part VLMG1500-GS08, "LED YLW-GRN 0402 SMD", Ambient Temperature Range High=85°C, Case Code (Imperial)=0402, Case Code (Metric)=1005, Color="Green, Yellow", Forward Current=30mA, Forward Voltage=2.4V, Illumination Color=Green, LCSC Part Number=C511404, Lens Color=Clear, Manufacturer=Vishay, Min Operating Temperature=-30°C, Power Dissipation=75mW, Reverse Voltage=5V, Supplier Part Number=VLMG1500-GS08CT-ND, Test Current=20mA, Case/Package=0402, Category=LEDs, ComponentLink1Description=https://datasheet.octopart.com:443/VLMG1500-GS08-Vishay-datasheet-181477802.pdf?src-supplier=IHS, ComponentLink1URL=https://datasheet.octopart.com:443/VLMG1500-GS08-Vishay-datasheet-181477802.pdf?src-supplier=IHS, ComponentLink2Description=https://datasheet.octopart.com:443/VLMG1500-GS08-Vishay-datasheet-21227148.pdf?src-supplier=element14+APAC, ComponentLink2URL=https://datasheet.octopart.com:443/VLMG1500-GS08-Vishay-datasheet-21227148.pdf?src-supplier=element14+APAC, ComponentLink3Description=https://datasheet.octopart.com:443/VLMG1500-GS08-Vishay-datasheet-33014519.pdf?src-supplier=element14+APAC, ComponentLink3URL=https://datasheet.octopart.com:443/VLMG1500-GS08-Vishay-datasheet-33014519.pdf?src-supplier=element14+APAC, ComponentLink4Description=https://datasheet.octopart.com:443/VLMG1500-GS08-Vishay-datasheet-62332426.pdf?src-supplier=Newark, ComponentLink4URL=https://datasheet.octopart.com:443/VLMG1500-GS08-Vishay-datasheet-62332426.pdf?src-supplier=Newark, ComponentLink5Description=https://datasheet.octopart.com:443/VLMG1500-GS08-Vishay-datasheet-102762782.pdf?src-supplier=Future+Electronics, ComponentLink5URL=https://datasheet.octopart.com:443/VLMG1500-GS08-Vishay-datasheet-102762782.pdf?src-supplier=Future+Electronics, ComponentLink6Description=https://datasheet.octopart.com:443/VLMG1500-GS08-Vishay-datasheet-68326145.pdf?src-supplier=TME, ComponentLink6URL=https://datasheet.octopart.com:443/VLMG1500-GS08-Vishay-datasheet-68326145.pdf?src-supplier=TME, ComponentLink7Description=http://sigma.octopart.com:80/rohs_statement/Vishay-company-15.pdf?src-supplier=Compliance+Statements, ComponentLink7URL=http://sigma.octopart.com:80/rohs_statement/Vishay-company-15.pdf?src-supplier=Compliance+Statements, Depth=500µm, Dominant Wavelength=571nm, Height=350µm, Lead Free="Lead Free", Length=1mm, Lens Style=Rectangular, Lifecycle Status=Production, Luminous Intensity=18mcd, Manufacturer Part Number=VLMG1500-GS08, Max Operating Temperature=85°C, Mounting Technology="Surface Mount", Number of Circuits=1, Number of Elements=1, Number of LEDs=1, Number of Terminals=2, Packaging="Cut Tape", Peak Wavelength=571nm, Pins=2, Power Rating=75mW, Pricing="1=0.24, 10=0.164, 100=0.1147, 500=0.09218, 1000=0.0847 (USD)", Radiation Hardening=No, REACH SVHC=Yes, RoHS=Compliant, Schedule B="8541402000, 8541402000|8541402000|8541402000|8541402000|8541402000", Shape=Rectangular, Stock=249466, Supplier=DigiKey, Terminal Pitch=675µm, Viewing Angle=130°, Wavelength=571nm, Width=500µm
D2: library part VLMS1500-GS08, "LED RED 0402 SMD", Case Code (Imperial)=0402, Case Code (Metric)=1005, Color=Red, Forward Current=30mA, Forward Voltage=2.4V, LCSC Part Number=C511370, Manufacturer=Vishay, Max Operating Temperature=85°C, Min Operating Temperature=-30°C, Power Rating=75mW, Reverse Voltage=5V, Supplier Part Number=VLMS1500-GS08CT-ND, Test Current=20mA, Case/Package=0402, Category=LEDs, ComponentLink1Description=https://datasheet.octopart.com:443/VLMS1500-GS08-Vishay-datasheet-181477802.pdf?src-supplier=IHS, ComponentLink1URL=https://datasheet.octopart.com:443/VLMS1500-GS08-Vishay-datasheet-181477802.pdf?src-supplier=IHS, ComponentLink2Description=https://datasheet.octopart.com:443/VLMS1500-GS08-Vishay-datasheet-21227148.pdf?src-supplier=Future+Electronics, ComponentLink2URL=https://datasheet.octopart.com:443/VLMS1500-GS08-Vishay-datasheet-21227148.pdf?src-supplier=Future+Electronics, ComponentLink3Description=https://datasheet.octopart.com:443/VLMS1500-GS08-Vishay-datasheet-102762782.pdf?src-supplier=Future+Electronics, ComponentLink3URL=https://datasheet.octopart.com:443/VLMS1500-GS08-Vishay-datasheet-102762782.pdf?src-supplier=Future+Electronics, ComponentLink4Description=https://datasheet.octopart.com:443/VLMS1500-GS08-Vishay-datasheet-33014519.pdf?src-supplier=element14+APAC, ComponentLink4URL=https://datasheet.octopart.com:443/VLMS1500-GS08-Vishay-datasheet-33014519.pdf?src-supplier=element14+APAC, ComponentLink5Description=https://datasheet.octopart.com:443/VLMS1500-GS08-Vishay-datasheet-68326145.pdf?src-supplier=TME, ComponentLink5URL=https://datasheet.octopart.com:443/VLMS1500-GS08-Vishay-datasheet-68326145.pdf?src-supplier=TME, ComponentLink6Description=https://datasheet.octopart.com:443/VLMS1500-GS08-Vishay-Siliconix-datasheet-62309867.pdf?src-supplier=RS+(Formerly+Allied+Electronics), ComponentLink6URL=https://datasheet.octopart.com:443/VLMS1500-GS08-Vishay-Siliconix-datasheet-62309867.pdf?src-supplier=RS+(Formerly+Allied+Electronics), ComponentLink7Description=https://datasheet.octopart.com:443/VLMS1500-GS08-Vishay-datasheet-62332426.pdf?src-supplier=Newark, ComponentLink7URL=https://datasheet.octopart.com:443/VLMS1500-GS08-Vishay-datasheet-62332426.pdf?src-supplier=Newark, ComponentLink8Description=https://datasheet.octopart.com/VLMS1500-GS08-Vishay-datasheet-16093911.pdf, ComponentLink8URL=https://datasheet.octopart.com/VLMS1500-GS08-Vishay-datasheet-16093911.pdf, ComponentLink9Description=http://sigma.octopart.com:80/rohs_statement/Vishay-company-15.pdf?src-supplier=Compliance+Statements, ComponentLink9URL=http://sigma.octopart.com:80/rohs_statement/Vishay-company-15.pdf?src-supplier=Compliance+Statements, Dominant Wavelength=631nm, Height=350µm, Illumination Color=Red, Lead Free="Lead Free", Length=1mm, Lens Style="Rectangular, Square", Lifecycle Status=Production, Luminous Intensity=18mcd, Manufacturer Part Number=VLMS1500-GS08, Mounting Technology="Surface Mount", Number of Circuits=1, Number of LEDs=1, Number of Terminals=2, Packaging="Cut Tape", Peak Wavelength=631nm, Pins=2, Pricing="1=0.24, 10=0.164, 100=0.1147, 500=0.09218, 1000=0.0847, 3000=0.07505, 6000=0.07012, 9000=0.06758, 15000=0.06472, 21000=0.06301, 30000=0.06135, 75000=0.05767, 150000=0.05537 (USD)", Radiation Hardening=No, REACH SVHC=Yes, RoHS=Compliant, Schedule B="8541402000, 8541402000|8541402000|8541402000|8541402000|8541402000", Shape=Rectangular, Supplier=DigiKey, Terminal Pitch=675µm, Viewing Angle=130°, Wavelength=631nm, Width=500µm
D3 D4 D5 D6 D7 D8: "TVS DIODE 5.3VWM 12VC SOD882", Breakdown Voltage=7.8V, Clamping Voltage=12V, LCSC Part Number=C3710326, Leakage Current=100nA, Manufacturer=Littelfuse, Max Breakdown Voltage=9V, Max Operating Temperature=150°C, Min Breakdown Voltage=6.8V, Min Operating Temperature=-40°C, Operating Supply Voltage=5.3V, Peak Pulse Power=40W, Supplier Part Number=F9321CT-ND, Category="TVS Diodes", ComponentLink1Description=https://datasheet.octopart.com:443/AQ3045-01ETG-Littelfuse-datasheet-180606588.pdf?src-supplier=IHS, ComponentLink1URL=https://datasheet.octopart.com:443/AQ3045-01ETG-Littelfuse-datasheet-180606588.pdf?src-supplier=IHS, ComponentLink2Description=https://datasheet.octopart.com:443/AQ3045-01ETG-Littelfuse-datasheet-183003566.pdf?src-supplier=JRH+Electronics, ComponentLink2URL=https://datasheet.octopart.com:443/AQ3045-01ETG-Littelfuse-datasheet-183003566.pdf?src-supplier=JRH+Electronics, ComponentLink3Description=https://datasheet.octopart.com:443/AQ3045-01ETG-Littelfuse-datasheet-140480283.pdf?src-supplier=ODG+(Origin+Data+Global), ComponentLink3URL=https://datasheet.octopart.com:443/AQ3045-01ETG-Littelfuse-datasheet-140480283.pdf?src-supplier=ODG+(Origin+Data+Global), ComponentLink4Description=https://datasheet.octopart.com:443/AQ3045-01ETG-Littelfuse-datasheet-101609968.pdf?src-supplier=Farnell, ComponentLink4URL=https://datasheet.octopart.com:443/AQ3045-01ETG-Littelfuse-datasheet-101609968.pdf?src-supplier=Farnell, ComponentLink5Description=https://datasheet.octopart.com:443/AQ3045-01ETG-Littelfuse-datasheet-170904929.pdf?src-supplier=Future+Electronics, ComponentLink5URL=https://datasheet.octopart.com:443/AQ3045-01ETG-Littelfuse-datasheet-170904929.pdf?src-supplier=Future+Electronics, Lifecycle Status=Production, Manufacturer Part Number=AQ3045-01ETG, Mounting Technology="Surface Mount", Number of Channels=1, Number of Elements=1, Number of Terminals=2, Packaging="Cut Tape", Peak Reverse Current=100nA, Polarity=Bidirectional, Pricing="1=0.43, 10=0.262, 100=0.137, 500=0.131 (USD)", REACH SVHC=Yes, Reverse Standoff Voltage=5.3V, RoHS=Compliant, Stock=13511, Supplier=DigiKey
J1 J2: "CONN HEADER VERT 24POS 2.54MM", Contact Resistance=20mΩ, Current Rating=4A, Housing Color=Black, Insulation Resistance=50GΩ, LCSC Part Number=C7145888, Manufacturer=Molex, Manufacturer Lifecycle Status=ACTIVE, Max Operating Temperature=75°C, Min Operating Temperature=-40°C, Supplier Part Number=900-0022284245-ND, Category="Headers and Wire Housings", China RoHS=Compliant, ComponentLink1Description=https://datasheet.octopart.com:443/22-28-4245-Molex-datasheet-166051265.pdf?src-supplier=IHS, ComponentLink1URL=https://datasheet.octopart.com:443/22-28-4245-Molex-datasheet-166051265.pdf?src-supplier=IHS, ComponentLink2Description=https://datasheet.octopart.com:443/022284245-Molex-datasheet-8337137.pdf?src-supplier=Arrow+Electronics, ComponentLink2URL=https://datasheet.octopart.com:443/022284245-Molex-datasheet-8337137.pdf?src-supplier=Arrow+Electronics, ComponentLink3Description=https://datasheet.octopart.com:443/22-28-4245-Molex-datasheet-16300812.pdf?src-supplier=Molex, ComponentLink3URL=https://datasheet.octopart.com:443/22-28-4245-Molex-datasheet-16300812.pdf?src-supplier=Molex, ComponentLink4Description=https://sigma.octopart.com:443/16300370/technical_drawing/Molex-22-28-4245.pdf?src-supplier=Molex, ComponentLink4URL=https://sigma.octopart.com:443/16300370/technical_drawing/Molex-22-28-4245.pdf?src-supplier=Molex, ComponentLink5Description=https://datasheet.octopart.com:443/22-28-4245-Molex-datasheet-4210.pdf?src-supplier=DigiKey, ComponentLink5URL=https://datasheet.octopart.com:443/22-28-4245-Molex-datasheet-4210.pdf?src-supplier=DigiKey, ComponentLink6Description=http://sigma.octopart.com:80/16300813/rohs_statement/Molex-22-28-4245.pdf?src-supplier=Compliance+Statements, ComponentLink6URL=http://sigma.octopart.com:80/16300813/rohs_statement/Molex-22-28-4245.pdf?src-supplier=Compliance+Statements, ComponentLink7Description=http://sigma.octopart.com:80/conflict_mineral_statement/Molex-company-72.pdf?src-supplier=Compliance+Statements, ComponentLink7URL=http://sigma.octopart.com:80/conflict_mineral_statement/Molex-company-72.pdf?src-supplier=Compliance+Statements, ComponentLink8Description=http://sigma.octopart.com:80/rohs_statement/Molex-company-73.pdf?src-supplier=Compliance+Statements, ComponentLink8URL=http://sigma.octopart.com:80/rohs_statement/Molex-company-73.pdf?src-supplier=Compliance+Statements, ComponentLink9Description=http://sigma.octopart.com:80/reach_statement/Molex-company-74.pdf?src-supplier=Compliance+Statements, ComponentLink9URL=http://sigma.octopart.com:80/reach_statement/Molex-company-74.pdf?src-supplier=Compliance+Statements, Contact Gender=Male, Contact Material=Brass, Contact Plating=Gold, Country of Origin=US, Gender=Male, Lead Free="Lead Free", Lifecycle Status=Production, Manufacturer Part Number=22-28-4245, Mounting Technology="Through Hole", Number of Circuits=24, Number of Contacts=24, Number of Positions=24, Number of Rows=1, Orientation=Vertical, Packaging=Bulk, Pins=24, Pitch=2.54mm, Plating=Tin, Plating Thickness=381nm, Pricing="1=1.21, 10=1.024, 100=0.8699, 500=0.77638, 1000=0.73932, 5000=0.65998, 10000=0.62851 (USD)", REACH SVHC=Yes, RoHS=Compliant, Schedule B="8536694040, 8536694040|8536694040|8536694040|8536694040|8536694040", Stock=1316, Supplier=DigiKey, Terminal Pitch=2.54mm, Termination=Solder
J3 J4: "CONN RCP USB2.0 TYP C 24P SMD RA", Contact Resistance=50mΩ, Current Rating=1.25A, Dielectric Material=Polyamide, Insulation Resistance=100MΩ, LCSC Part Number=C3197684, Manufacturer=Molex, Max Operating Temperature=85°C, Min Operating Temperature=-40°C, Supplier Part Number=900-2171790001CT-ND, Voltage Rating=30V, Category="USB Connectors", ComponentLink1Description=https://datasheet.octopart.com:443/217179-0001-Molex-datasheet-158871109.pdf?src-supplier=ODG+(Origin+Data+Global), ComponentLink1URL=https://datasheet.octopart.com:443/217179-0001-Molex-datasheet-158871109.pdf?src-supplier=ODG+(Origin+Data+Global), ComponentLink2Description=https://sigma.octopart.com:443/158871110/technical_drawing/Molex-217179-0001.pdf?src-supplier=Upverter, ComponentLink2URL=https://sigma.octopart.com:443/158871110/technical_drawing/Molex-217179-0001.pdf?src-supplier=Upverter, ComponentLink3Description=https://datasheet.octopart.com:443/217179-0001-Molex-datasheet-164573281.pdf?src-supplier=RS+(Formerly+Allied+Electronics), ComponentLink3URL=https://datasheet.octopart.com:443/217179-0001-Molex-datasheet-164573281.pdf?src-supplier=RS+(Formerly+Allied+Electronics), ComponentLink4Description=http://sigma.octopart.com:80/conflict_mineral_statement/Molex-company-72.pdf?src-supplier=Compliance+Statements, ComponentLink4URL=http://sigma.octopart.com:80/conflict_mineral_statement/Molex-company-72.pdf?src-supplier=Compliance+Statements, ComponentLink5Description=http://sigma.octopart.com:80/rohs_statement/Molex-company-73.pdf?src-supplier=Compliance+Statements, ComponentLink5URL=http://sigma.octopart.com:80/rohs_statement/Molex-company-73.pdf?src-supplier=Compliance+Statements, ComponentLink6Description=http://sigma.octopart.com:80/reach_statement/Molex-company-74.pdf?src-supplier=Compliance+Statements, ComponentLink6URL=http://sigma.octopart.com:80/reach_statement/Molex-company-74.pdf?src-supplier=Compliance+Statements, Contact Gender=Female, Contact Material="Gold, Nickel", Gender=Receptacle, Height=3.36mm, Lifecycle Status=Production, Manufacturer Part Number=217179-0001, Number of Contacts=16, Number of Ports=1, Number of Rows=1, Pins=16, Pricing="1=0.83, 10=0.704, 25=0.6596, 50=0.628, 100=0.598, 250=0.56052, 500=0.53374 (USD)", REACH SVHC=Yes, RoHS=Compliant, Shell Finish=Nickel, Shell Material="Stainless Steel", Stock=5847, Supplier=DigiKey, Terminal Pitch=500µm, USB Standard="USB 2.0"
J5: "CONN HEADER VERT 3POS 1.27MM", LCSC Part Number=C3333578, Manufacturer=Samtec, Manufacturer Lifecycle Status=PRODUCTION, Supplier Part Number=612-FTS-103-01-F-S-ND, Category="Headers and Wire Housings", ComponentLink1Description=https://datasheet.octopart.com:443/FTS-103-01-F-S-Samtec-datasheet-97029283.pdf?src-supplier=Newark, ComponentLink1URL=https://datasheet.octopart.com:443/FTS-103-01-F-S-Samtec-datasheet-97029283.pdf?src-supplier=Newark, ComponentLink2Description=https://datasheet.octopart.com:443/FTS-103-01-F-S-Samtec-datasheet-165596534.pdf?src-supplier=Newark, ComponentLink2URL=https://datasheet.octopart.com:443/FTS-103-01-F-S-Samtec-datasheet-165596534.pdf?src-supplier=Newark, ComponentLink3Description=https://sigma.octopart.com:443/97029285/technical_drawing/Samtec-FTS-103-01-F-S.pdf?src-supplier=element14+APAC, ComponentLink3URL=https://sigma.octopart.com:443/97029285/technical_drawing/Samtec-FTS-103-01-F-S.pdf?src-supplier=element14+APAC, ComponentLink4Description=https://datasheet.octopart.com:443/FTS-103-01-F-S-Samtec-datasheet-118493358.pdf?src-supplier=Electro+Sonic, ComponentLink4URL=https://datasheet.octopart.com:443/FTS-103-01-F-S-Samtec-datasheet-118493358.pdf?src-supplier=Electro+Sonic, ComponentLink5Description=https://datasheet.octopart.com:443/FTS-103-01-F-S-Samtec-datasheet-176663378.pdf?src-supplier=Toby+Electronics, ComponentLink5URL=https://datasheet.octopart.com:443/FTS-103-01-F-S-Samtec-datasheet-176663378.pdf?src-supplier=Toby+Electronics, ComponentLink6Description=https://datasheet.octopart.com:443/FTS-103-01-F-S-Samtec-datasheet-116535195.pdf?src-supplier=Toby+Electronics, ComponentLink6URL=https://datasheet.octopart.com:443/FTS-103-01-F-S-Samtec-datasheet-116535195.pdf?src-supplier=Toby+Electronics, ComponentLink7Description=https://datasheet.octopart.com:443/FTS-103-01-F-S-Samtec-datasheet-136395376.pdf?src-supplier=Toby+Electronics, ComponentLink7URL=https://datasheet.octopart.com:443/FTS-103-01-F-S-Samtec-datasheet-136395376.pdf?src-supplier=Toby+Electronics, ComponentLink8Description=https://datasheet.octopart.com:443/FTS-103-01-F-S-Samtec-datasheet-151470456.pdf?src-supplier=Sager+Electronics, ComponentLink8URL=https://datasheet.octopart.com:443/FTS-103-01-F-S-Samtec-datasheet-151470456.pdf?src-supplier=Sager+Electronics, Contact Plating=Gold, Gender=Male, Lifecycle Status=Production, Manufacturer Part Number=FTS-103-01-F-S, Mounting Technology="Through Hole", Number of Contacts=3, Number of Rows=1, Packaging=Bulk, Pitch=1.27mm, Pricing="1=0.73, 50=0.6378, 100=0.5407, 500=0.4491, 1000=0.38362, 2000=0.31431, 5000=0.29982 (USD)", Radiation Hardening=No, RoHS=Compliant, Stock=2657, Supplier=DigiKey, Termination=Solder
J6: "CONN HEADER VERT 2POS 1.27MM", LCSC Part Number=C6045317, Manufacturer=Samtec, Manufacturer Lifecycle Status=PRODUCTION, Supplier Part Number=SAM15176-ND, Category="Headers and Wire Housings", ComponentLink1Description=https://datasheet.octopart.com:443/FTS-102-01-F-S-Samtec-datasheet-97029283.pdf?src-supplier=Newark, ComponentLink1URL=https://datasheet.octopart.com:443/FTS-102-01-F-S-Samtec-datasheet-97029283.pdf?src-supplier=Newark, ComponentLink2Description=https://sigma.octopart.com:443/97029285/technical_drawing/Samtec-FTS-102-01-F-S.pdf?src-supplier=Newark, ComponentLink2URL=https://sigma.octopart.com:443/97029285/technical_drawing/Samtec-FTS-102-01-F-S.pdf?src-supplier=Newark, ComponentLink3Description=https://datasheet.octopart.com:443/FTS-102-01-F-S-Samtec-datasheet-118493358.pdf?src-supplier=Electro+Sonic, ComponentLink3URL=https://datasheet.octopart.com:443/FTS-102-01-F-S-Samtec-datasheet-118493358.pdf?src-supplier=Electro+Sonic, ComponentLink4Description=https://datasheet.octopart.com:443/FTS-102-01-F-S-Samtec-datasheet-165596534.pdf?src-supplier=JRH+Electronics, ComponentLink4URL=https://datasheet.octopart.com:443/FTS-102-01-F-S-Samtec-datasheet-165596534.pdf?src-supplier=JRH+Electronics, ComponentLink5Description=https://datasheet.octopart.com:443/FTS-102-01-F-S-Samtec-datasheet-176663378.pdf?src-supplier=Toby+Electronics, ComponentLink5URL=https://datasheet.octopart.com:443/FTS-102-01-F-S-Samtec-datasheet-176663378.pdf?src-supplier=Toby+Electronics, ComponentLink6Description=https://datasheet.octopart.com:443/FTS-102-01-F-S-Samtec-datasheet-116535195.pdf?src-supplier=Toby+Electronics, ComponentLink6URL=https://datasheet.octopart.com:443/FTS-102-01-F-S-Samtec-datasheet-116535195.pdf?src-supplier=Toby+Electronics, ComponentLink7Description=https://datasheet.octopart.com:443/FTS-102-01-F-S-Samtec-datasheet-136395376.pdf?src-supplier=Toby+Electronics, ComponentLink7URL=https://datasheet.octopart.com:443/FTS-102-01-F-S-Samtec-datasheet-136395376.pdf?src-supplier=Toby+Electronics, ComponentLink8Description=https://datasheet.octopart.com:443/FTS-102-01-F-S-Samtec-datasheet-151470456.pdf?src-supplier=Sager+Electronics, ComponentLink8URL=https://datasheet.octopart.com:443/FTS-102-01-F-S-Samtec-datasheet-151470456.pdf?src-supplier=Sager+Electronics, Contact Plating=Gold, Gender=Male, Lifecycle Status=Production, Manufacturer Part Number=FTS-102-01-F-S, Mounting Technology="Through Hole", Number of Contacts=2, Number of Rows=1, Packaging=Bulk, Pitch=1.27mm, Pricing="1=0.49, 50=0.4252, 100=0.3608, 500=0.2994, 1000=0.25609, 2000=0.252 (USD)", Radiation Hardening=No, RoHS=Compliant, Stock=861, Supplier=DigiKey, Termination=Solder
Q1 Q2: "TRANS NPN 25V 1.5A SOT-23-3", Case/Package=TO-236-3, Collector Base Voltage (VCBO)=40V, Collector Emitter Breakdown Voltage=25V, Collector Emitter Saturation Voltage=500mV, Emitter Base Voltage (VEBO)=5V, LCSC Part Number=C164886, Manufacturer=Comchip, Max Collector Current=1.5A, Max Junction Temperature (Tj)=150°C, Max Power Dissipation=300mW, Supplier Part Number=641-1790-1-ND, Transition Frequency=100MHz, Category=BJTs, Collector Emitter Voltage (VCEO)=25V, ComponentLink1Description=https://datasheet.octopart.com:443/SS8050-G-Comchip-datasheet-180131983.pdf?src-supplier=IHS, ComponentLink1URL=https://datasheet.octopart.com:443/SS8050-G-Comchip-datasheet-180131983.pdf?src-supplier=IHS, ComponentLink2Description=https://datasheet.octopart.com:443/SS8050-G-Comchip-datasheet-155422643.pdf?src-supplier=Upverter, ComponentLink2URL=https://datasheet.octopart.com:443/SS8050-G-Comchip-datasheet-155422643.pdf?src-supplier=Upverter, ComponentLink3Description=https://datasheet.octopart.com:443/SS8050-G-Comchip-datasheet-189767092.pdf?src-supplier=ODG+(Origin+Data+Global), ComponentLink3URL=https://datasheet.octopart.com:443/SS8050-G-Comchip-datasheet-189767092.pdf?src-supplier=ODG+(Origin+Data+Global), Height=1.15mm, hFE Min=40, Lifecycle Status=Production, Manufacturer Part Number=SS8050-G, Max Breakdown Voltage=25V, Max Operating Temperature=150°C, Mounting Technology="Surface Mount", Number of Elements=1, Number of Terminals=3, Power Dissipation=300mW, Pricing="1=0.24, 10=0.148, 100=0.0921, 500=0.06754, 1000=0.05958 (USD)", REACH SVHC=Yes, RoHS=Compliant, Schedule B=8541100070|8541100070|8541100070|8541100070|8541100070, Stock=62709, Supplier=DigiKey